# EAGLE board panel_revA (EAGLE 9.4.0)

Size 198 x 120 mm. Coordinates in mm from the lower left corner, seen from the top.
Outline: 193,120 5,120
Outline: 5,0 193,0
Outline: 198,5 198,115
Outline: 0,115 0,5
Outline: 198,115 arc90 193,120
Outline: 193,0 arc90 198,5
Outline: 0,5 arc90 5,0
Outline: 193,0 arc90 198,5
Outline: 198,115 arc90 193,120
Outline: 0,5 arc90 5,0
Outline: 5,120 arc90 0,115
Outline: 5,120 arc90 0,115
Outline: 47,76.9 47,96.9
Outline: 20.25,76.15 46.25,76.15
Outline: 97.25,97.65 71.25,97.65
Outline: 70.5,96.9 70.5,76.9
Outline: 97.25,76.15 71.25,76.15
Outline: 19.5,76.9 19.5,96.9
Outline: 98,76.9 98,96.9
Outline: 46.25,97.65 20.25,97.65
Outline: 20.25,97.65 arc90 19.5,96.9
Outline: 98,96.9 arc90 97.25,97.65
Outline: 46.25,76.15 arc90 47,76.9
Outline: 98,96.9 arc90 97.25,97.65
Outline: 70.5,76.9 arc90 71.25,76.15
Outline: 19.5,76.9 arc90 20.25,76.15
Outline: 47,96.9 arc90 46.25,97.65
Outline: 20.25,97.65 arc90 19.5,96.9
Outline: 70.5,76.9 arc90 71.25,76.15
Outline: 71.25,97.65 arc90 70.5,96.9
Outline: 46.25,76.15 arc90 47,76.9
Outline: 19.5,76.9 arc90 20.25,76.15
Outline: 97.25,76.15 arc90 98,76.9
Outline: 71.25,97.65 arc90 70.5,96.9
Outline: 47,96.9 arc90 46.25,97.65
Outline: 97.25,76.15 arc90 98,76.9
Outline: 116.65,91.1 116.05,91.1
Outline: 117.4,93.45 117.4,91.85
Outline: 115.3,91.85 115.3,93.45
Outline: 116.05,29.2 116.65,29.2
Outline: 98,23.4 98,43.4
Outline: 152.23,36.9 152.23,83.65
Outline: 97.25,22.65 71.25,22.65
Outline: 20.25,44.15 46.25,44.15
Outline: 179.28,36.15 152.98,36.15
Outline: 46.25,22.65 20.25,22.65
Outline: 71.25,44.15 97.25,44.15
Outline: 70.5,23.4 70.5,43.4
Outline: 152.98,84.4 179.28,84.4
Outline: 117.4,28.45 117.4,26.85
Outline: 115.3,28.45 115.3,26.85
Outline: 19.5,43.4 19.5,23.4
Outline: 47,23.4 47,43.4
Outline: 116.65,94.2 116.05,94.2
Outline: 180.03,83.65 180.03,36.9
Outline: 116.65,26.1 116.05,26.1
Outline: 180.03,83.65 arc90 179.28,84.4
Outline: 152.23,36.9 arc90 152.98,36.15
Outline: 179.28,36.15 arc90 180.03,36.9
Outline: 117.4,28.45 arc90 116.65,29.2
Outline: 180.03,83.65 arc90 179.28,84.4
Outline: 70.5,23.4 arc90 71.25,22.65
Outline: 115.3,26.85 arc90 116.05,26.1
Outline: 116.65,26.1 arc90 117.4,26.85
Outline: 115.3,26.85 arc90 116.05,26.1
Outline: 116.05,29.2 arc90 115.3,28.45
Outline: 116.65,91.1 arc90 117.4,91.85
Outline: 97.25,22.65 arc90 98,23.4
Outline: 115.3,91.85 arc90 116.05,91.1
Outline: 117.4,28.45 arc90 116.65,29.2
Outline: 19.5,23.4 arc90 20.25,22.65
Outline: 98,43.4 arc90 97.25,44.15
Outline: 71.25,44.15 arc90 70.5,43.4
Outline: 46.25,22.65 arc90 47,23.4
Outline: 46.25,22.65 arc90 47,23.4
Outline: 70.5,23.4 arc90 71.25,22.65
Outline: 19.5,23.4 arc90 20.25,22.65
Outline: 116.05,94.2 arc90 115.3,93.45
Outline: 152.98,84.4 arc90 152.23,83.65
Outline: 20.25,44.15 arc90 19.5,43.4
Outline: 47,43.4 arc90 46.25,44.15
Outline: 117.4,93.45 arc90 116.65,94.2
Outline: 47,43.4 arc90 46.25,44.15
Outline: 179.28,36.15 arc90 180.03,36.9
Outline: 117.4,93.45 arc90 116.65,94.2
Outline: 98,43.4 arc90 97.25,44.15
Outline: 115.3,91.85 arc90 116.05,91.1
Outline: 71.25,44.15 arc90 70.5,43.4
Outline: 97.25,22.65 arc90 98,23.4
Outline: 116.05,29.2 arc90 115.3,28.45
Outline: 116.65,91.1 arc90 117.4,91.85
Outline: 116.05,94.2 arc90 115.3,93.45
Outline: 116.65,26.1 arc90 117.4,26.85
Outline: 152.23,36.9 arc90 152.98,36.15
Outline: 20.25,44.15 arc90 19.5,43.4
Outline: 152.98,84.4 arc90 152.23,83.65
Outline: circle at 5.23,114.15 radius 2.55
Outline: circle at 192.33,5.9 radius 2.55
Outline: circle at 5.23,5.9 radius 2.55
Outline: circle at 192.33,114.15 radius 2.55
Outline: circle at 192.33,5.9 radius 2.55
Outline: circle at 5.23,5.9 radius 2.55
Outline: circle at 5.23,114.15 radius 2.55
Outline: circle at 192.33,114.15 radius 2.55
Outline: circle at 123.75,27.65 radius 3.65
Outline: circle at 123.75,92.65 radius 3.65
Outline: circle at 186.13,60.15 radius 2
Outline: circle at 146.13,60.15 radius 2
Outline: circle at 123.75,92.65 radius 3.65
Outline: circle at 186.13,60.15 radius 2
Outline: circle at 123.75,27.65 radius 3.65
Outline: circle at 146.13,60.15 radius 2
Copper layers (1*16): Top 0.035mm / dielectric 1.5mm / Bottom 0.035mm
Design rules "SparkFun": minimum track width 8mil, minimum drill 20mil, track to track 8mil, track to pad 8mil, pad to pad 8mil, via to via 8mil, smd to smd 8mil, copper to edge 10mil, drill to drill 8mil, minimum pad ring 12mil, minimum via ring 10mil, stop-mask expansion 4mil, vias tented up to drill 25mil, thermal gap 10mil
Milling: area 120.1,24 to 127.4,31.3; area 120.1,89 to 127.4,96.3; area 184.1,58.2 to 188.1,62.2; area 144.1,58.2 to 148.1,62.2; area 120.1,89 to 127.4,96.3; area 184.1,58.2 to 188.1,62.2; area 120.1,24 to 127.4,31.3; area 144.1,58.2 to 148.1,62.2; 84 lines

## Footprints (pad centres in the part's own frame; a part is rotated, then mirrored left to right if it is on the bottom)
5,0 = hole 5: 0,0

## Placement (x,y rotation side)
E$1  [5,0]  5.27,5.94 0 top
E$2  [5,0]  5.27,114.14 0 top
E$3  [5,0]  192.47,114.14 0 top
E$4  [5,0]  192.34,5.81 0 top

## Library data of the parts
E$1-E$4 = holes

## Text on the board
Top: 2000
tPlace: Glitch | Glitch-O-Matic | Brightness